# Altium PCB AVR Programmer.PcbDoc
Units mm, origin at the board's own origin, x right, y up, seen from the top; angles counter-clockwise.
Board outline 96.65 x 66.55 mm, 2 copper layers (Top Layer, Bottom Layer); 35 components, 26 nets, 132 pads, 0 vias.
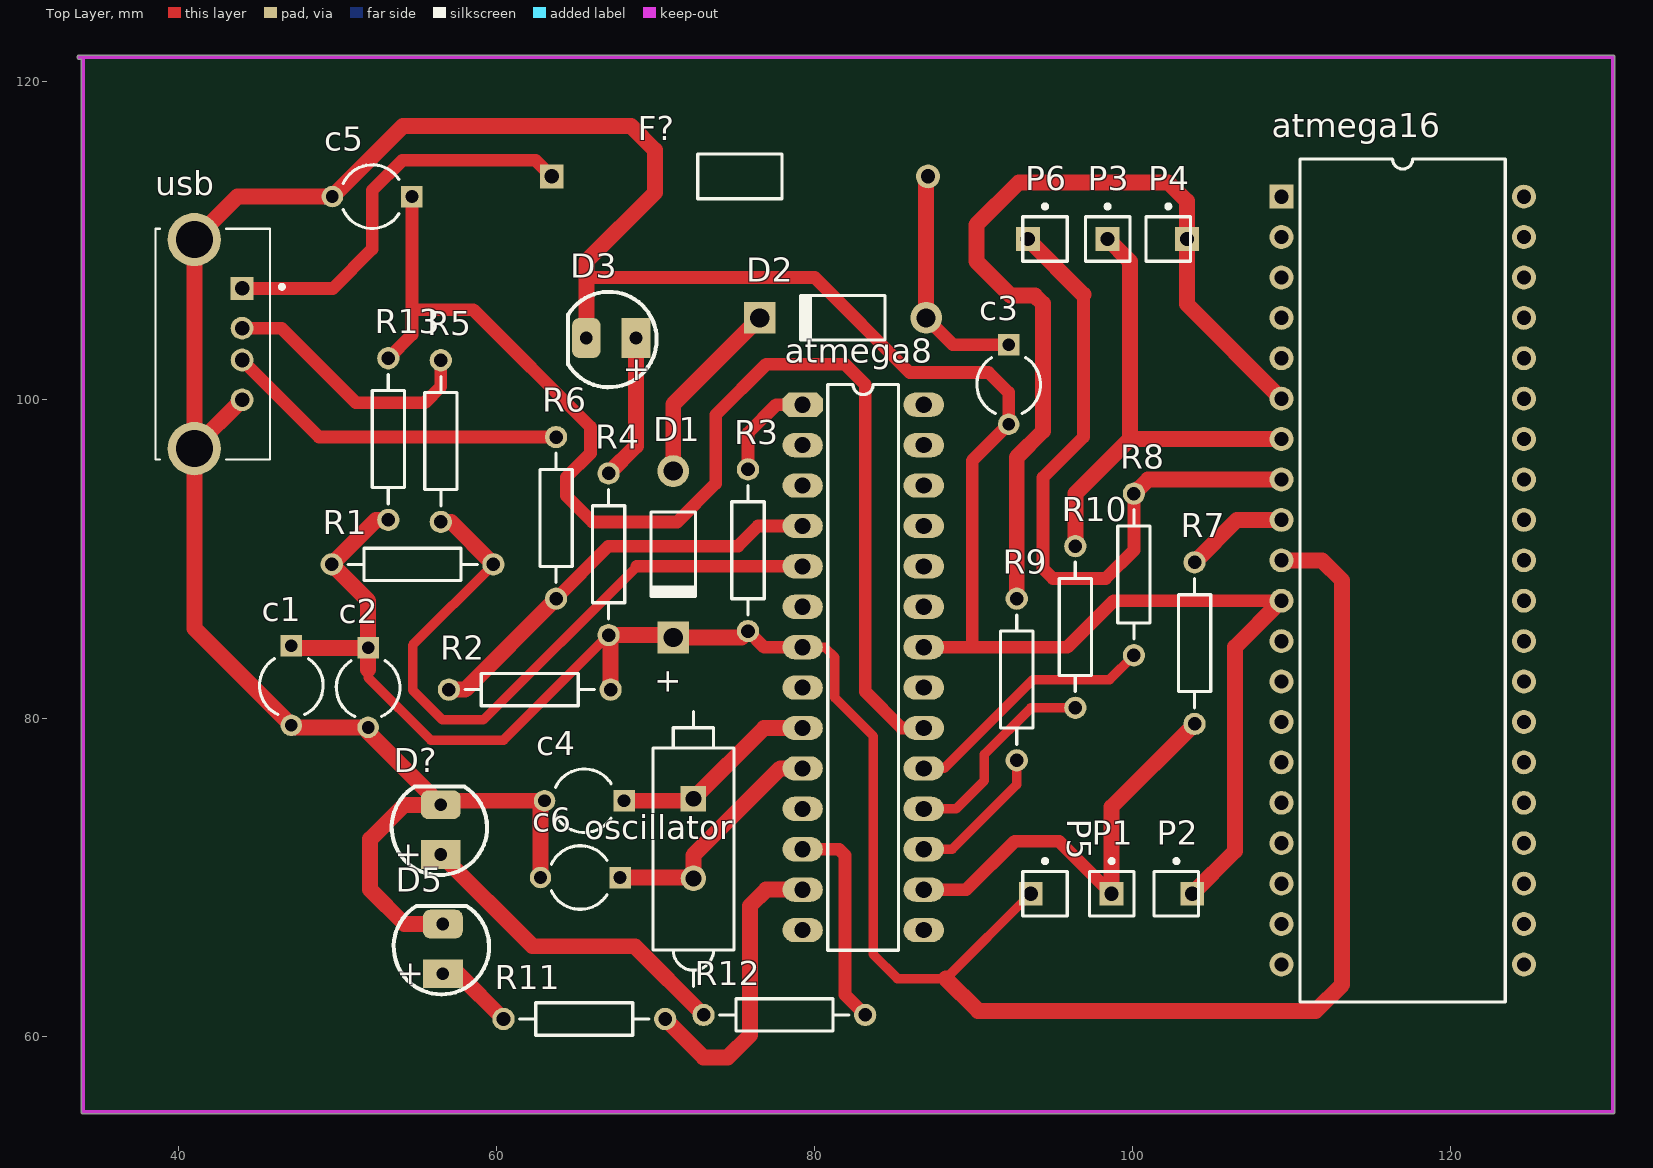
[diagram p0: Top Layer view]
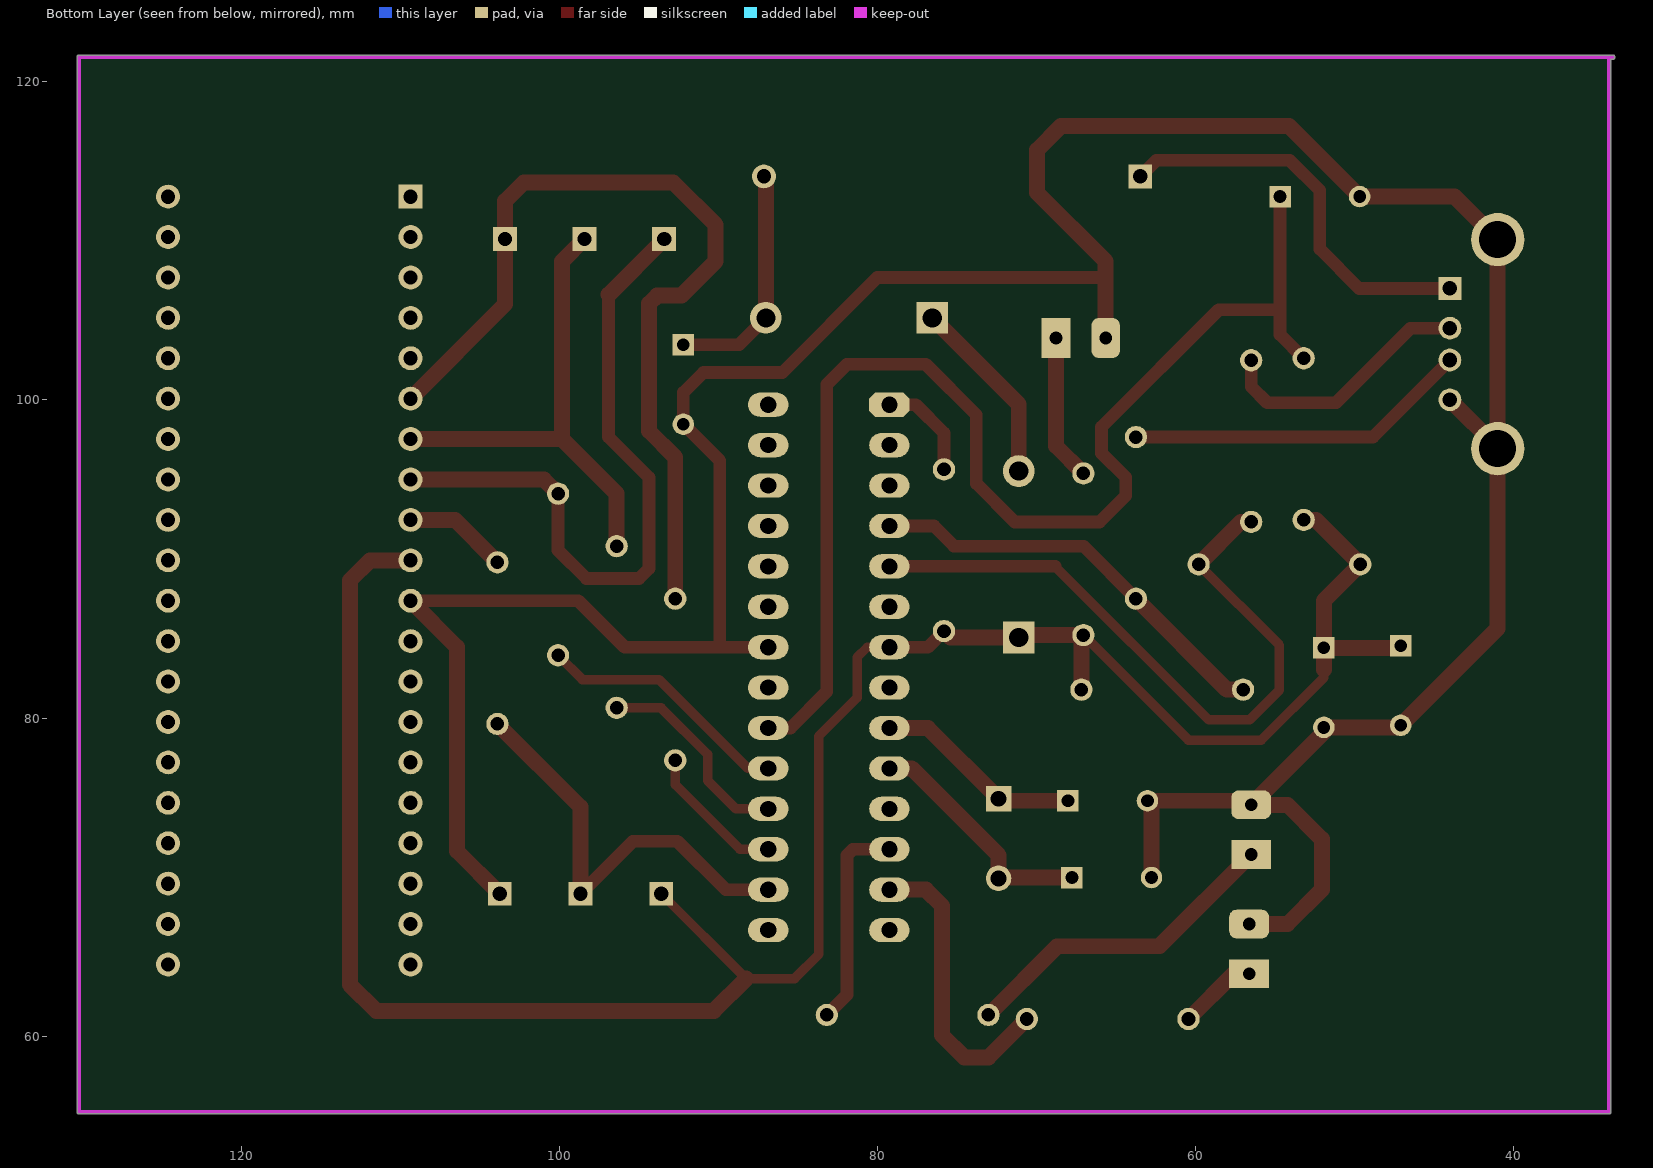
[diagram p1: Bottom Layer view, seen from below]

## Layer stack, top to bottom
Top Solder: solder mask 0.0102, Solder Resist, Dk 3.5
Top Layer: signal copper 0.0356
Dielectric 1: dielectric 0.32, FR-4, Dk 4.8
Bottom Layer: signal copper 0.0356
Bottom Solder: solder mask 0.0102, Solder Resist, Dk 3.5

## Board outline
33.782,121.412 cw(c33.782,121.539) 33.782,121.666 130.175,121.666 cw(c130.175,121.539) 130.302,121.539 130.302,55.245 cw(c130.175,55.245) 130.175,55.118 34.036,55.118 cw(c34.036,55.245) 33.909,55.245 33.909,121.412

## Design rules (kind name [scope] priority, off if disabled: settings)
Clearance [All] p1: gap=0.254 ignorepadtopadclearanceinfootprint=FALSE except(0: Arc-Hole Track-Hole SMDPad-Hole THPad-Hole Via-Hole Fill-Hole Poly-Hole Region-Hole Text-Hole)
PolygonConnect [All] p1: connectstyle=Relief reliefconductorwidth=0.254 reliefentries=4 polygonreliefangle="90 Angle" airgapwidth=0.254
RoutingVias [All] p1: holewidth=0.711 width=1.27 viastyle="Through Hole" minholewidth=0.711 minwidth=1.27 maxholewidth=0.711 maxwidth=1.27
SolderMaskExpansion [All] p1: expansion=0.102 istentingtop=FALSE
Width [All] p1: maxlimit=1 minlimit=0.6 preferedwidth=0.8
30 further rules are at their usual default settings.

## Components (designator, comment, footprint, x,y, rotation, side; value= is the part's Value field where it differs from the comment)
atmega8 "ATmega8-16PI" My_28P3 83.058,83.185 r270 top
atmega16 "ATmega16-16PC" 40P6 116.967,88.646 r270 top
c1 "Cap2" CAPR5-4X5 47.117,82.042 r270 top value=100pF
c2 "Cap2" CAPR5-4X5 51.943,81.915 r270 top value=100pF
c3 "Cap2" CAPR5-4X5 92.202,100.965 r270 top value=100pF
c4 "Cap2" CAPR5-4X5 65.532,74.803 r180 top value=100pF
c5 "Cap2" CAPR5-4X5 52.197,112.776 r180 top value=100pF
c6 "Cap2" CAPR5-4X5 65.278,69.977 r180 top value=100pF
D1 "Diode 1N4007" DO-41 71.12,90.297 r270 top
D2 "Diode 1N4007" DO-41 81.788,105.156 r180 top
D3 "POWER" LED-1 67.183,103.886 r270 top
D5 "WR" LED-1 56.642,65.532 r180 top
D? "RD" LED-1 56.515,73.025 r180 top
F? "Fuse Thermal" PIN-W2/E2.8 75.311,114.046 r0 top
oscillator "Cap Pol2" POLAR0.8 72.39,71.77 r90 top value=100pF
P1 "RESET" PIN1#1 98.679,68.961 r0 top
P2 "GND" PIN1#2 102.743,68.961 r0 top
P3 "MISO" PIN1#3 98.425,110.109 r0 top
P4 "MOSI" PIN1#4 102.235,110.109 r0 top
P5 "VCC" PIN1#5 94.488,68.961 r0 top
P6 "SCK" PIN1#6 94.488,110.109 r0 top
R1 "Res2" AXIAL-0.4 54.737,89.662 r180 top value=1.5K
R2 "Res2" AXIAL-0.4 62.103,81.788 r0 top value=1M
R3 "Res2" AXIAL-0.4 75.819,90.551 r90 top value=10K
R4 "Res2" AXIAL-0.4 67.056,90.297 r90 top value=330
R5 "Res2" AXIAL-0.4 56.515,97.409 r270 top value=68
R6 "Res2" AXIAL-0.4 63.754,92.583 r270 top value=68
R7 "Res2" AXIAL-0.4 103.886,84.709 r90 top value=330
R8 "Res2" AXIAL-0.4 100.076,89.027 r90 top value=330
R9 "Res2" AXIAL-0.4 92.71,82.423 r90 top value=330
R10 "Res2" AXIAL-0.4 96.393,85.725 r90 top value=330
R11 "Res2" AXIAL-0.4 65.532,61.087 r0 top value=330
R12 "Res2" AXIAL-0.4 78.105,61.341 r0 top value=330
R13 "Res2" AXIAL-0.4 53.213,97.536 r90 top value=100
usb "USB-A1VSB6" *ONSHORE_USB-A1VSB6_USB-A1VSB6(Primary) 41.021,103.505 r270 top

## Footprints (in the part's own frame and the unit in brackets; to place one, negate y for a bottom-side part, rotate by r counter-clockwise, add the part's x,y. Pads: shape width x height; smd on the part's side, far side on the other; paste and mask are expansions set on the pad)
40P6 [mm] "DIP; 40 Leads; Row Spacing 15.24 mm; Pitch 2.54 mm"
  rect 1.5x1.5 hole 0.9: 1(-24.13,-7.62)
  round 1.5 hole 0.9: 2(-21.59,-7.62) 3(-19.05,-7.62) 4(-16.51,-7.62) 5(-13.97,-7.62) 6(-11.43,-7.62) 7(-8.89,-7.62) 8(-6.35,-7.62) 9(-3.81,-7.62) 10(-1.27,-7.62) 11(1.27,-7.62) 12(3.81,-7.62) 13(6.35,-7.62) 14(8.89,-7.62) 15(11.43,-7.62) 16(13.97,-7.62) 17(16.51,-7.62) 18(19.05,-7.62) 19(21.59,-7.62) 20(24.13,-7.62) 21(24.13,7.62) 22(21.59,7.62) 23(19.05,7.62) 24(16.51,7.62) 25(13.97,7.62) 26(11.43,7.62) 27(8.89,7.62) 28(6.35,7.62) 29(3.81,7.62) 30(1.27,7.62) 31(-1.27,7.62) 32(-3.81,7.62) 33(-6.35,7.62) 34(-8.89,7.62) 35(-11.43,7.62) 36(-13.97,7.62) 37(-16.51,7.62) 38(-19.05,7.62) 39(-21.59,7.62) 40(-24.13,7.62)
  silkscreen extent -26.5,-6.45 26.5,6.45
*ONSHORE_USB-A1VSB6_USB-A1VSB6(Primary) [mm]
  rect 1.428x1.428 hole 0.92: 1(-3.5,3)
  round 1.428 hole 0.92: 2(-1,3) 3(1,3) 4(3.5,3)
  round 3.346 hole 2.33: S1(-6.57,0) S2(6.57,0)
  silkscreen extent -7.25,-2.45 7.25,5.6
AXIAL-0.4 [mm] "Axial Device, Thru-Hole; 2 Leads; 0.4 in Pin Spacing"
  round 1.4 hole 0.85: 1(-5.08,0) 2(5.08,0)
  silkscreen extent -4.06,-1.02 4.06,1.02
CAPR5-4X5 [mm] "Capacitor; 2 Leads"
  rect 1.35x1.35 hole 0.8: 1(-2.5,0)
  round 1.35 hole 0.8: 2(2.5,0)
  silkscreen extent -1.69,-2 1.82,2
DO-41 [mm] "Diode, Axial; Body 5.2 x 2.7 mm (LxDia. max), Lead Dia. 0.86 mm (max)"
  round 2 hole 1.2: 1(-5.23,0)
  rect 2x2 hole 1.2: 2(5.23,0)
  silkscreen extent -2.65,-1.4 2.75,1.4
LED-1 [mm] "LED; 2 Leads"
  rect 2.5x1.8 hole 0.8: 1(0,1.597)
  rrect50% 2.5x1.8 hole 0.8: 2(0,-1.524)
  silkscreen extent -2.91,-2.67 3.09,2.9
My_28P3 [mil]
  oct 60x100 hole 40: 1(-650,-150)
  oval 60x100 hole 40: 2(-550,-150) 3(-450,-150) 4(-350,-150) 5(-250,-150) 6(-150,-150) 7(-50,-150) 8(50,-150) 9(150,-150) 10(250,-150) 11(350,-150) 12(450,-150) 13(550,-150) 14(650,-150) 15(650,150) 16(550,150) 17(450,150) 18(350,150) 19(250,150) 20(150,150) 21(50,150) 22(-50,150) 23(-150,150) 24(-250,150) 25(-350,150) 26(-450,150) 27(-550,150) 28(-650,150)
  silkscreen extent -700,-88 700,88
PIN1#1 [mm] "Connector; Plug"
  rect 1.5x1.5 hole 0.9: 1(-0.012,0)
  silkscreen extent -1.4,-1.4 1.4,2.17
PIN1#2 [mm] "Connector; Plug"
  rect 1.5x1.5 hole 0.9: 1(1,0)
  silkscreen extent -1.4,-1.4 1.4,2.17
PIN1#3 [mm] "Connector; Plug"
  rect 1.5x1.5 hole 0.9: 1(-0.006,0)
  silkscreen extent -1.4,-1.4 1.4,2.17
PIN1#4 [mm] "Connector; Plug"
  rect 1.5x1.5 hole 0.9: 1(1.174,0)
  silkscreen extent -1.4,-1.4 1.4,2.17
PIN1#5 [mm] "Connector; Plug"
  rect 1.5x1.5 hole 0.9: 1(-0.9,0)
  silkscreen extent -1.4,-1.4 1.4,2.17
PIN1#6 [mm] "Connector; Plug"
  rect 1.5x1.5 hole 0.9: 1(-1.081,0)
  silkscreen extent -1.4,-1.4 1.4,2.17
PIN-W2/E2.8 [mm] "Thru-Hole; 2 Leads"
  rect 1.5x1.5 hole 0.9: 1(-11.825,0)
  round 1.5 hole 0.9: 2(11.825,0)
  silkscreen extent -2.65,-1.4 2.65,1.4
POLAR0.8 [mm] "Polarized Capacitor; 2 Leads"
  rect 1.6x1.6 hole 1: 1(3.16,0)
  round 1.6 hole 1: 2(-1.84,0)
  silkscreen extent -8.64,-2.54 8.64,2.54

## Part data
atmega8: "AVR 8K Bytes of In-System Programmable Flash Memory", ComponentLink1Description="Manufacturer Link", ComponentLink1URL=http://www.atmel.com, ComponentLink2Description=Datasheet, ComponentLink2URL=http://www.atmel.com/dyn/resources/prod_documents/doc2486.pdf, DatasheetVersion=2486H-AVR-09/02, LatestRevisionDate=04-Mar-2005, LatestRevisionNote="Stylized 3D Model Added.", PackageDescription="DIP; 28 Leads; Row Spacing 7.62 mm; Pitch 2.54 mm", PackageReference=28P3, PackageVersion="revB, Sep-2001", Published=17-Sep-2003, Publisher="Altium Limited"
atmega16: "8-Bit AVR Microcontroller with 16K Bytes of In-System Programmable Flash Memory", Package Information="Latest Revision: Dec-1999", Package Reference=40P6, Datasheet="Latest Revision: 2466E-AVR-10/02", Published=17-Sep-2003, Publisher="Altium Limited"
c1 c2 c3 c4 c5 c6: "Capacitor", PackageDescription="Capacitor; 2 Leads", PackageReference=CAPR5-4X5, Published=23-Sep-2002, Publisher="Altium Limited"
D1 D2: "1 Amp General Purpose Rectifier", Code_JEDEC=DO-204-AL, ComponentLink1Description="Manufacturer Link", ComponentLink1URL=http://www.fairchildsemi.com/, ComponentLink2Description=Datasheet, ComponentLink2URL=http://www.fairchildsemi.com/ds/1N%2F1N4001.pdf, DatasheetVersion=1998, LatestRevisionDate=17-Jul-2002, LatestRevisionNote="Re-released for DXP Platform.", PackageDescription="Diode, Axial; Body 5.2 x 2.7 mm (LxDia. max), Lead Dia. 0.86 mm (max)", PackageReference=DO-41, PackageVersion=Aug-1999, Published=8-Jun-2000, Publisher="Altium Limited"
D3 D5 D?: library part "LED IR 5mm", "Typical LED", Designer="Seyed Mohsen Ghasemian", PackageDescription="LED; 2 Leads", PackageReference=LED, Published=07/31/2012, Publisher=www.picpars.com
F?: "Thermal Fuse", LatestRevisionDate=17-Jul-2002, LatestRevisionNote="Re-released for DXP Platform.", PackageDescription="Thru-Hole; 2 Leads", PackageReference=PIN-W2/E2.8, Published=24-Mar-1999, Publisher="Altium Limited"
oscillator: "Polarized Capacitor (Axial)", LatestRevisionDate=17-Jul-2002, LatestRevisionNote="Re-released for DXP Platform.", PackageDescription="Polarized Capacitor; 2 Leads", PackageReference=POLAR0.8, Published=8-Jun-2000, Publisher="Altium Limited"
P1 P2 P3 P4 P5 P6: library part Plug, "Plug", LatestRevisionDate=17-Jul-2002, LatestRevisionNote="Re-released for DXP Platform.", Publisher="Altium Limited"
R1 R2 R3 R4 R5 R6 R7 R8 R9 R10 R11 R12 R13: "Resistor", LatestRevisionDate=17-Jul-2002, LatestRevisionNote="Re-released for DXP Platform.", PackageDescription="Axial Device, Thru-Hole; 2 Leads; 0.4 in Pin Spacing", PackageReference=AXIAL-0.4, Published=8-Jun-2000, Publisher="Altium Limited"
usb: "Conn Usb Type a Vertical Black", Package=None, Availability=Unavailable, MF="On Shore", MP=USB-A1VSB6, Price=None, SnapEDA_Link=https://www.snapeda.com/parts/USB-A1VSB6/On%20Shore%20Technology%20Inc./view-part/?ref=snap

## Nets (pads, with @x,y where several pads share a name; then routed paths per layer and width w, separated by ;. In a path a pad name is that pad's centre, name@x,y a point inside that pad or via, vN(x,y) a via of type N, cw(c..) or ccw(c..) an arc to the next point about the centre after c; other vN are vias at no path point)
GND: atmega8.22 atmega16.11 c1.2 c2.2 c3.2 c4.2 c5.2 c6.2 D3.2 D5.2 D?.2 P2.1 usb.4 usb.S1 usb.S2 | length 211.5
  Top Layer w0.8: 65.659,107.696 80.01,107.696 85.979,101.727 90.932,101.727 92.202,100.457 c3.2 89.916,96.179 89.916,84.455 ; atmega8.22 89.916,84.455 ; atmega16.11 98.806,87.376 95.885,84.455 89.916,84.455
  Top Layer w1: usb.4 usb.S2@41.021,97.005 ; D5.2 54.229,67.056 52.07,69.215 52.07,72.39 54.229,74.549 D?.2 ; c6.2 62.778,74.549 c4.2 56.769,74.803 D?.2 ; D3.2 65.659,107.696 65.659,108.712 69.977,113.03 69.977,115.697 68.453,117.221 54.142,117.221 c5.2 43.722,112.776 usb.S1 usb.S2@41.021,97.005 ; P2.1 106.426,71.644 106.426,84.455 atmega16.11 ; usb.S2@41.021,97.005 usb.S2 41.021,85.638 c1.2 47.244,79.415 c2.2 51.943,79.121 D?.2
Netatmega8_1: atmega8.1 R3.2 | length 6.5
  Top Layer w0.8: R3.2 75.819,97.917 77.597,99.695 atmega8.1
Netatmega8_4: atmega8.4 R2.1 R6.2 | length 26.5
  Top Layer w0.8: R6.2 67.056,90.805 75.184,90.805 76.454,92.075 atmega8.4
  Top Layer w1: R2.1 58.039,81.788 R6.2
Netatmega8_5: atmega8.5 R1.1 R5.2 | length 43.7
  Top Layer w0.6: R1.1 54.737,84.582 54.737,81.755 56.609,79.883 59.182,79.883 68.834,89.535
  Top Layer w0.8: 68.834,89.535 atmega8.5
  Top Layer w1: R5.2 57.15,92.329 R1.1
Netatmega8_7: atmega8.7 atmega16.10 c1.1 c2.1 D1.2 P5.1 R1.2 R2.2 R3.1 R4.1 R13.1 | length 144.3
  Top Layer w0.6: 51.943,83.058 51.943,82.55 55.88,78.613 60.452,78.613 R4.1 ; atmega8.7 80.645,84.455 81.28,83.82 81.28,81.28 83.693,78.867 83.693,65.151 85.217,63.627 88.254,63.627 P5.1
  Top Layer w0.8: R3.1 76.835,84.455 atmega8.7
  Top Layer w1: c1.1 47.244,84.415 c2.1 ; 51.943,83.058 c2.1 ; R13.1 52.451,92.456 R1.2 51.943,87.376 c2.1 ; R2.2 67.183,85.09 R4.1 70.97,85.217 D1.2 75.415,85.067 R3.1 ; 88.254,63.627 90.286,61.595 111.506,61.595 113.157,63.246 113.157,88.646 111.887,89.916 atmega16.10
Netatmega8_9: atmega8.9 c4.1 oscillator.1 | length 13.1
  Top Layer w1: c4.1 72.263,74.803 oscillator.1 76.835,79.375 atmega8.9
Netatmega8_10: atmega8.10 c6.1 oscillator.2 | length 15.2
  Top Layer w1: c6.1 72.343,69.977 oscillator.2 72.39,71.374 77.851,76.835 atmega8.10
Netatmega8_12: atmega8.12 R12.2 | length 13.4
  Top Layer w0.8: atmega8.12 81.534,71.755 81.915,71.374 81.915,62.611 R12.2
Netatmega8_13: atmega8.13 R11.2 | length 18.8
  Top Layer w1: R11.2 73.025,58.674 74.549,58.674 75.946,60.071 75.946,68.199 76.962,69.215 atmega8.13
Netatmega8_16: atmega8.16 P1.1 R7.1 | length 27.6
  Top Layer w0.8: atmega8.16 89.535,69.215 92.583,72.263 95.365,72.263 P1.1
  Top Layer w1: atmega8.16 atmega8.16@87.122,68.961 ; P1.1 98.667,74.41 R7.1
Netatmega8_17: atmega8.17 R9.1 | length 9
  Top Layer w0.6: atmega8.17 88.646,71.755 92.71,75.819 R9.1
Netatmega8_18: atmega8.18 R10.1 | length 13.1
  Top Layer w0.6: atmega8.18 88.9,74.295 90.678,76.073 90.678,77.724 93.599,80.645 R10.1
Netatmega8_19: atmega8.19 R8.1 | length 16.2
  Top Layer w0.6: atmega8.19 88.138,76.835 93.726,82.423 98.552,82.423 R8.1
Netatmega8_20: atmega8.20 c5.1 R13.2 | length 80.6
  Top Layer w0.8: R13.2 54.697,104.1 54.697,105.664 ; c5.1 54.697,105.664 ; atmega8.20 85.471,79.375 83.185,81.661 83.185,100.965 81.915,102.235 76.962,102.235 73.787,99.06 73.787,94.742 71.374,92.329 66.04,92.329 64.389,93.98 64.389,95.123 65.913,96.647 65.913,98.298 58.547,105.664 54.697,105.664
Netatmega16_6: atmega16.6 P4.1 R9.2 | length 56.5
  Top Layer w1: R9.2 92.71,96.393 94.361,98.044 94.361,106.045 93.853,106.553 92.329,106.553 90.17,108.712 90.17,110.998 92.837,113.665 102.235,113.665 103.409,112.491 P4.1 103.409,106.014 atmega16.6
Netatmega16_7: atmega16.7 P3.1 R10.2 | length 30.8
  Top Layer w1: R10.2 96.393,94.107 99.822,97.536 ; P3.1 99.822,108.706 99.822,97.536 ; atmega16.7 99.822,97.536
Netatmega16_8: atmega16.8 P6.1 R8.2 | length 43.1
  Top Layer w0.8: 96.901,106.615 96.901,97.663 94.361,95.123 94.361,89.408 94.996,88.773 98.298,88.773 100.076,90.551 R8.2
  Top Layer w1: P6.1 96.901,106.615 ; R8.2 100.965,94.996 atmega16.8
Netatmega16_9: atmega16.9 R7.2 | length 6.6
  Top Layer w1: R7.2 106.553,92.456 atmega16.9
Netc3_1: c3.1 D2.1 F?.2 | length 14.8
  Top Layer w0.8: D2.1 88.709,103.465 c3.1
  Top Layer w1: D2.1 87.018,113.928 F?.2
NetD1_1: D1.1 D2.2 | length 11.9
  Top Layer w1: D1.1 71.12,99.718 D2.2
NetD3_1: D3.1 R4.2 | length 9.2
  Top Layer w1: R4.2 68.78,97.101 D3.1
NetD5_1: D5.1 R11.1 | length 5
  Top Layer w1: D5.1 57.604,63.935 R11.1
NetD?_1: D?.1 R12.1 | length 20.7
  Top Layer w1: D?.1 62.284,65.659 68.707,65.659 R12.1
NetF?_1: F?.1 usb.1 | length 25.4
  Top Layer w0.8: usb.1 49.728,107.005 52.197,109.474 52.197,113.157 54.102,115.062 62.47,115.062 F?.1
NetR5_1: R5.1 usb.2 | length 16.5
  Top Layer w0.8: usb.2 46.498,104.505 51.181,99.822 55.499,99.822 56.515,100.838 R5.1
NetR6_1: R6.1 usb.3 | length 21.7
  Top Layer w0.8: usb.3 48.863,97.663 R6.1
pads on no net: atmega8.2 atmega8.3 atmega8.6 atmega8.8 atmega8.11 atmega8.14 atmega8.15 atmega8.21 atmega8.23 atmega8.24 atmega8.25 atmega8.26 atmega8.27 atmega8.28 atmega16.1 atmega16.2 atmega16.3 atmega16.4 atmega16.5 atmega16.12 atmega16.13 atmega16.14 atmega16.15 atmega16.16 atmega16.17 atmega16.18 atmega16.19 atmega16.20 atmega16.21 atmega16.22 atmega16.23 atmega16.24 atmega16.25 atmega16.26 atmega16.27 atmega16.28 atmega16.29 atmega16.30 atmega16.31 atmega16.32 atmega16.33 atmega16.34 atmega16.35 atmega16.36 atmega16.37 atmega16.38 atmega16.39 atmega16.40

## Keep-outs
Keep-Out Layer:
  lines w0.254: 33.782,121.539 130.175,121.539 130.175,55.245 34.036,55.245 34.036,121.539

## Text inside footprints (layer, text, board x,y; h text height)
D3: Top Overlay "+" at 67.945,101.219 h1.52
D5: Top Overlay "+" at 53.975,64.77 h1.52 r270
D?: Top Overlay "+" at 53.848,72.263 h1.52 r270
oscillator: Top Overlay "+" at 71.44,81.422 h1.5 r90